# EAGLE board 88_Fatar Adapter (EAGLE 6.1)
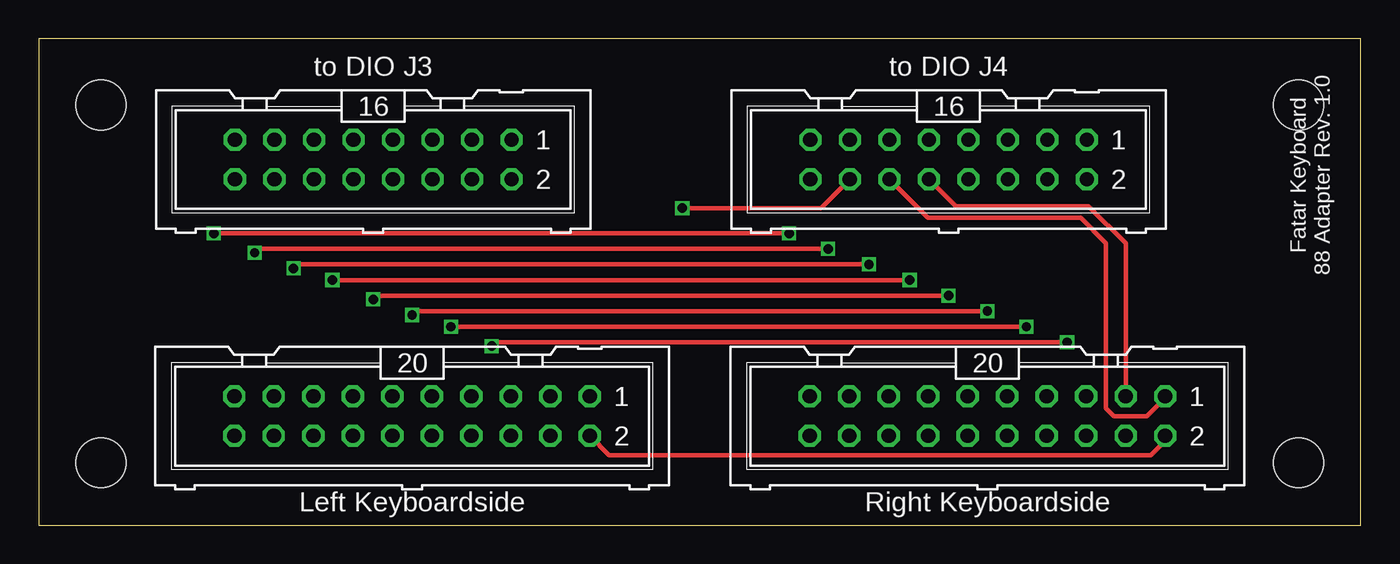
[diagram p0: board, top side]
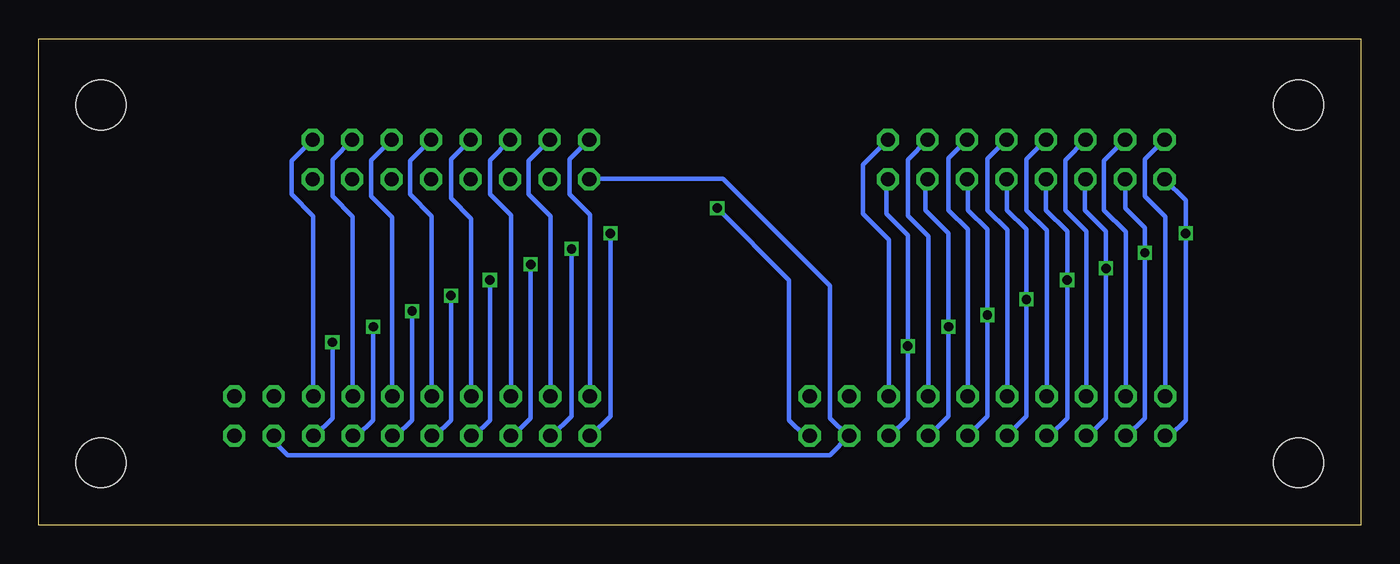
[diagram p1: board, bottom side, seen from below]

Size 85 x 31.25 mm. Coordinates in mm from the lower left corner, seen from the top.
Outline: 0,0 85,0 85,31.25 0,31.25 0,0
Copper layers (1*16): Top 0.035mm / dielectric 1.5mm / Bottom 0.035mm
Design rules: minimum track width 6mil, minimum drill 12mil, track to track 6mil, track to pad 6mil, pad to pad 6mil, via to via 6mil, smd to smd 0mil, copper to edge 10mil, drill to drill 10mil, minimum pad ring 10mil, minimum via ring 6mil, stop-mask expansion 2mil, vias tented up to drill 100mil, thermal gap 10mil
Holes 3.2 mm at 4,27 4,4 81,4 81,27

## Footprints (pad centres in the part's own frame; a part is rotated, then mirrored left to right if it is on the bottom)
ML20 = drill 0.914 octagon: 1 -11.43,-1.27; 2 -11.43,1.27; 3 -8.89,-1.27; 4 -8.89,1.27; 5 -6.35,-1.27; 6 -6.35,1.27; 7 -3.81,-1.27; 8 -3.81,1.27; 9 -1.27,-1.27; 10 -1.27,1.27; 11 1.27,-1.27; 12 1.27,1.27; 13 3.81,-1.27; 14 3.81,1.27; 15 6.35,-1.27; 16 6.35,1.27; 17 8.89,-1.27; 18 8.89,1.27; 19 11.43,-1.27; 20 11.43,1.27
ML16 = drill 0.914 octagon: 1 -8.89,-1.27; 2 -8.89,1.27; 3 -6.35,-1.27; 4 -6.35,1.27; 5 -3.81,-1.27; 6 -3.81,1.27; 7 -1.27,-1.27; 8 -1.27,1.27; 9 1.27,-1.27; 10 1.27,1.27; 11 3.81,-1.27; 12 3.81,1.27; 13 6.35,-1.27; 14 6.35,1.27; 15 8.89,-1.27; 16 8.89,1.27

## Placement (x,y rotation side)
LEFT  [ML20]  24,7 180 top
RIGHT  [ML20]  61,7 180 top
SV3  [ML16]  21.5,23.5 180 top
SV4  [ML16]  58.5,23.5 180 top

## Library data of the parts
LEFT RIGHT SV3 SV4 = con-harting-ml; OC_FARNELL: unknown; OC_NEWARK: unknown

## Nets
BK0: LEFT.18 RIGHT.18 SV3.14
BK1: LEFT.14 RIGHT.14 SV3.10
BK2: LEFT.10 RIGHT.10 SV3.6
BK3: LEFT.6 RIGHT.6 SV3.2
BK4: LEFT.2 RIGHT.2 SV4.14
BK10: RIGHT.3 SV4.10
MK0: LEFT.20 RIGHT.20 SV3.16
MK1: LEFT.16 RIGHT.16 SV3.12
MK2: LEFT.12 RIGHT.12 SV3.8
MK3: LEFT.8 RIGHT.8 SV3.4
MK4: LEFT.4 RIGHT.4 SV4.16
MK10: RIGHT.1 SV4.12
T0: LEFT.19 SV3.15
T1: LEFT.17 SV3.13
T2: LEFT.15 SV3.11
T3: LEFT.13 SV3.9
T4: LEFT.11 SV3.7
T5: LEFT.9 SV3.5
T6: LEFT.7 SV3.3
T7: LEFT.5 SV3.1
T_R0: RIGHT.19 SV4.15
T_R1: RIGHT.17 SV4.13
T_R2: RIGHT.15 SV4.11
T_R3: RIGHT.13 SV4.9
T_R4: RIGHT.11 SV4.7
T_R5: RIGHT.9 SV4.5
T_R6: RIGHT.7 SV4.3
T_R7: RIGHT.5 SV4.1

## Tracks (layer width: path | path; a pad name or v marks a point on that pad's centre or on a via)
BK0  (via drill 0.6)
  Top 0.305: v50.75,17.75 14.12,17.75 v13.88,17.5
  Bottom 0.305: LEFT.18 15.02,5.73 13.88,6.88 v13.88,17.5 13.88,19.12 15.12,20.38 15.12,22.2 SV3.14 | RIGHT.18 52.02,5.73 50.75,7 v50.75,17.75
BK1  (via drill 0.6)
  Top 0.305: v56,15.75 v18.88,15.75
  Bottom 0.305: LEFT.14 20.02,5.73 18.88,6.88 v18.88,15.75 18.88,18.88 20.25,20.25 20.25,22.21 SV3.10 | RIGHT.14 57.02,5.73 56,6.75 v56,15.75
BK2  (via drill 0.6)
  Top 0.305: v61,13.75 24.25,13.75 v24,13.5
  Bottom 0.305: LEFT.10 24,7 v24,13.5 24,19 25.25,20.25 25.25,22.17 SV3.6 | RIGHT.10 62.02,5.73 61,6.75 v61,13.75
BK3  (via drill 0.6)
  Top 0.305: v66.12,11.75 29.38,11.75 v29.12,11.5
  Bottom 0.305: LEFT.6 30.27,5.73 29.12,6.88 v29.12,11.5 29.12,18.62 30.5,20 30.5,22.12 SV3.2 | RIGHT.6 67.27,5.73 66.12,6.88 v66.12,11.75
BK4  (via drill 0.6)
  Top 0.305: v41.38,20.38 50.3,20.38 SV4.14 | RIGHT.2 72.43,5.43 71.5,4.5 36.66,4.5 LEFT.2
  Bottom 0.305: LEFT.2 35.73,5.73 36.75,6.75 36.75,15.75 v41.38,20.38
BK10
  Top 0.305: RIGHT.3 69.89,18.11 67.5,20.5 58.96,20.5 SV4.10
MK0  (via drill 0.6)
  Top 0.305: v48.25,18.75 v11.25,18.75
  Bottom 0.305: LEFT.20 12.27,5.73 11.25,6.75 v11.25,18.75 11.25,20.87 SV3.16 | RIGHT.20 49.52,5.73 48.25,7 v48.25,18.75
MK1  (via drill 0.6)
  Top 0.305: v53.38,16.75 16.62,16.75 v16.38,16.5
  Bottom 0.305: LEFT.16 17.52,5.73 16.38,6.88 v16.38,16.5 16.38,18.88 17.75,20.25 17.75,22.17 SV3.12 | RIGHT.16 54.52,5.73 53.38,6.88 v53.38,16.75
MK2  (via drill 0.6)
  Top 0.305: v58.5,14.75 21.75,14.75 v21.5,14.5
  Bottom 0.305: LEFT.12 22.73,5.77 21.5,7 v21.5,14.5 21.5,19 22.75,20.25 22.75,22.21 SV3.8 | RIGHT.12 59.52,5.73 58.5,6.75 v58.5,14.75
MK3  (via drill 0.6)
  Top 0.305: v63.5,12.75 v26.5,12.75
  Bottom 0.305: LEFT.8 27.77,5.73 26.5,7 v26.5,12.75 26.5,18.75 28,20.25 28,22.08 SV3.4 | RIGHT.8 64.52,5.73 63.5,6.75 v63.5,12.75
MK4
  Bottom 0.305: SV4.16 49.59,22.25 41,22.25 34.12,15.38 34.12,6.88 32.98,5.73 LEFT.4 34.12,4.5 69,4.5 69.89,5.39 RIGHT.4
MK10
  Top 0.305: RIGHT.1 72.43,8.18 71.25,7 69.12,7 68.62,7.5 68.62,18.12 67,19.75 57.17,19.75 SV4.12
T0
  Bottom 0.305: LEFT.19 12.57,19.82 13.88,21.12 13.88,23.5 SV3.15
T1
  Bottom 0.305: LEFT.17 15.11,18.86 16.5,20.25 16.5,23.42 SV3.13
T2
  Bottom 0.305: LEFT.15 17.65,18.9 19,20.25 19,23.46 SV3.11
T3
  Bottom 0.305: LEFT.13 20.19,18.94 21.5,20.25 21.5,23.5 SV3.9
T4
  Bottom 0.305: LEFT.11 22.73,18.98 24,20.25 24,23.54 SV3.7
T5
  Bottom 0.305: LEFT.9 25.27,19.02 26.5,20.25 26.5,23.58 SV3.5
T6
  Bottom 0.305: LEFT.7 27.81,18.56 29.12,19.88 29.12,23.5 SV3.3
T7
  Bottom 0.305: LEFT.5 30.35,18.35 32,20 32,23.16 SV3.1
T_R0
  Bottom 0.305: RIGHT.19 49.57,19.95 50.88,21.25 50.88,23.5 SV4.15
T_R1
  Bottom 0.305: RIGHT.17 52.11,19.86 53.5,21.25 53.5,23.42 SV4.13
T_R2
  Bottom 0.305: RIGHT.15 54.65,19.9 56,21.25 56,23.46 SV4.11
T_R3
  Bottom 0.305: RIGHT.13 57.19,19.69 58.5,21 58.5,23.5 SV4.9
T_R4
  Bottom 0.305: RIGHT.11 59.73,19.86 61.12,21.25 61.12,23.41 SV4.7
T_R5
  Bottom 0.305: RIGHT.9 62.27,19.77 63.62,21.12 63.62,23.45 SV4.5
T_R6
  Bottom 0.305: RIGHT.7 64.81,19.81 66.12,21.12 66.12,23.5 SV4.3
T_R7
  Bottom 0.305: RIGHT.5 67.35,19.85 68.75,21.25 68.75,23.41 SV4.1

## Text on the board
tPlace: to DIO J3 | to DIO J4 | Fatar Keyboard / 88 Adapter Rev. 1.0 | Left Keyboardside | Right Keyboardside